# Altium PCB PCB1.PcbDoc (part 1 of 2)
Units mm, origin at the board's own origin, x right, y up, seen from the top; angles counter-clockwise.
Board outline 93.92 x 89.66 mm, 2 copper layers (Top Layer, Bottom Layer); 110 components, 45 nets, 506 pads, 98 vias.
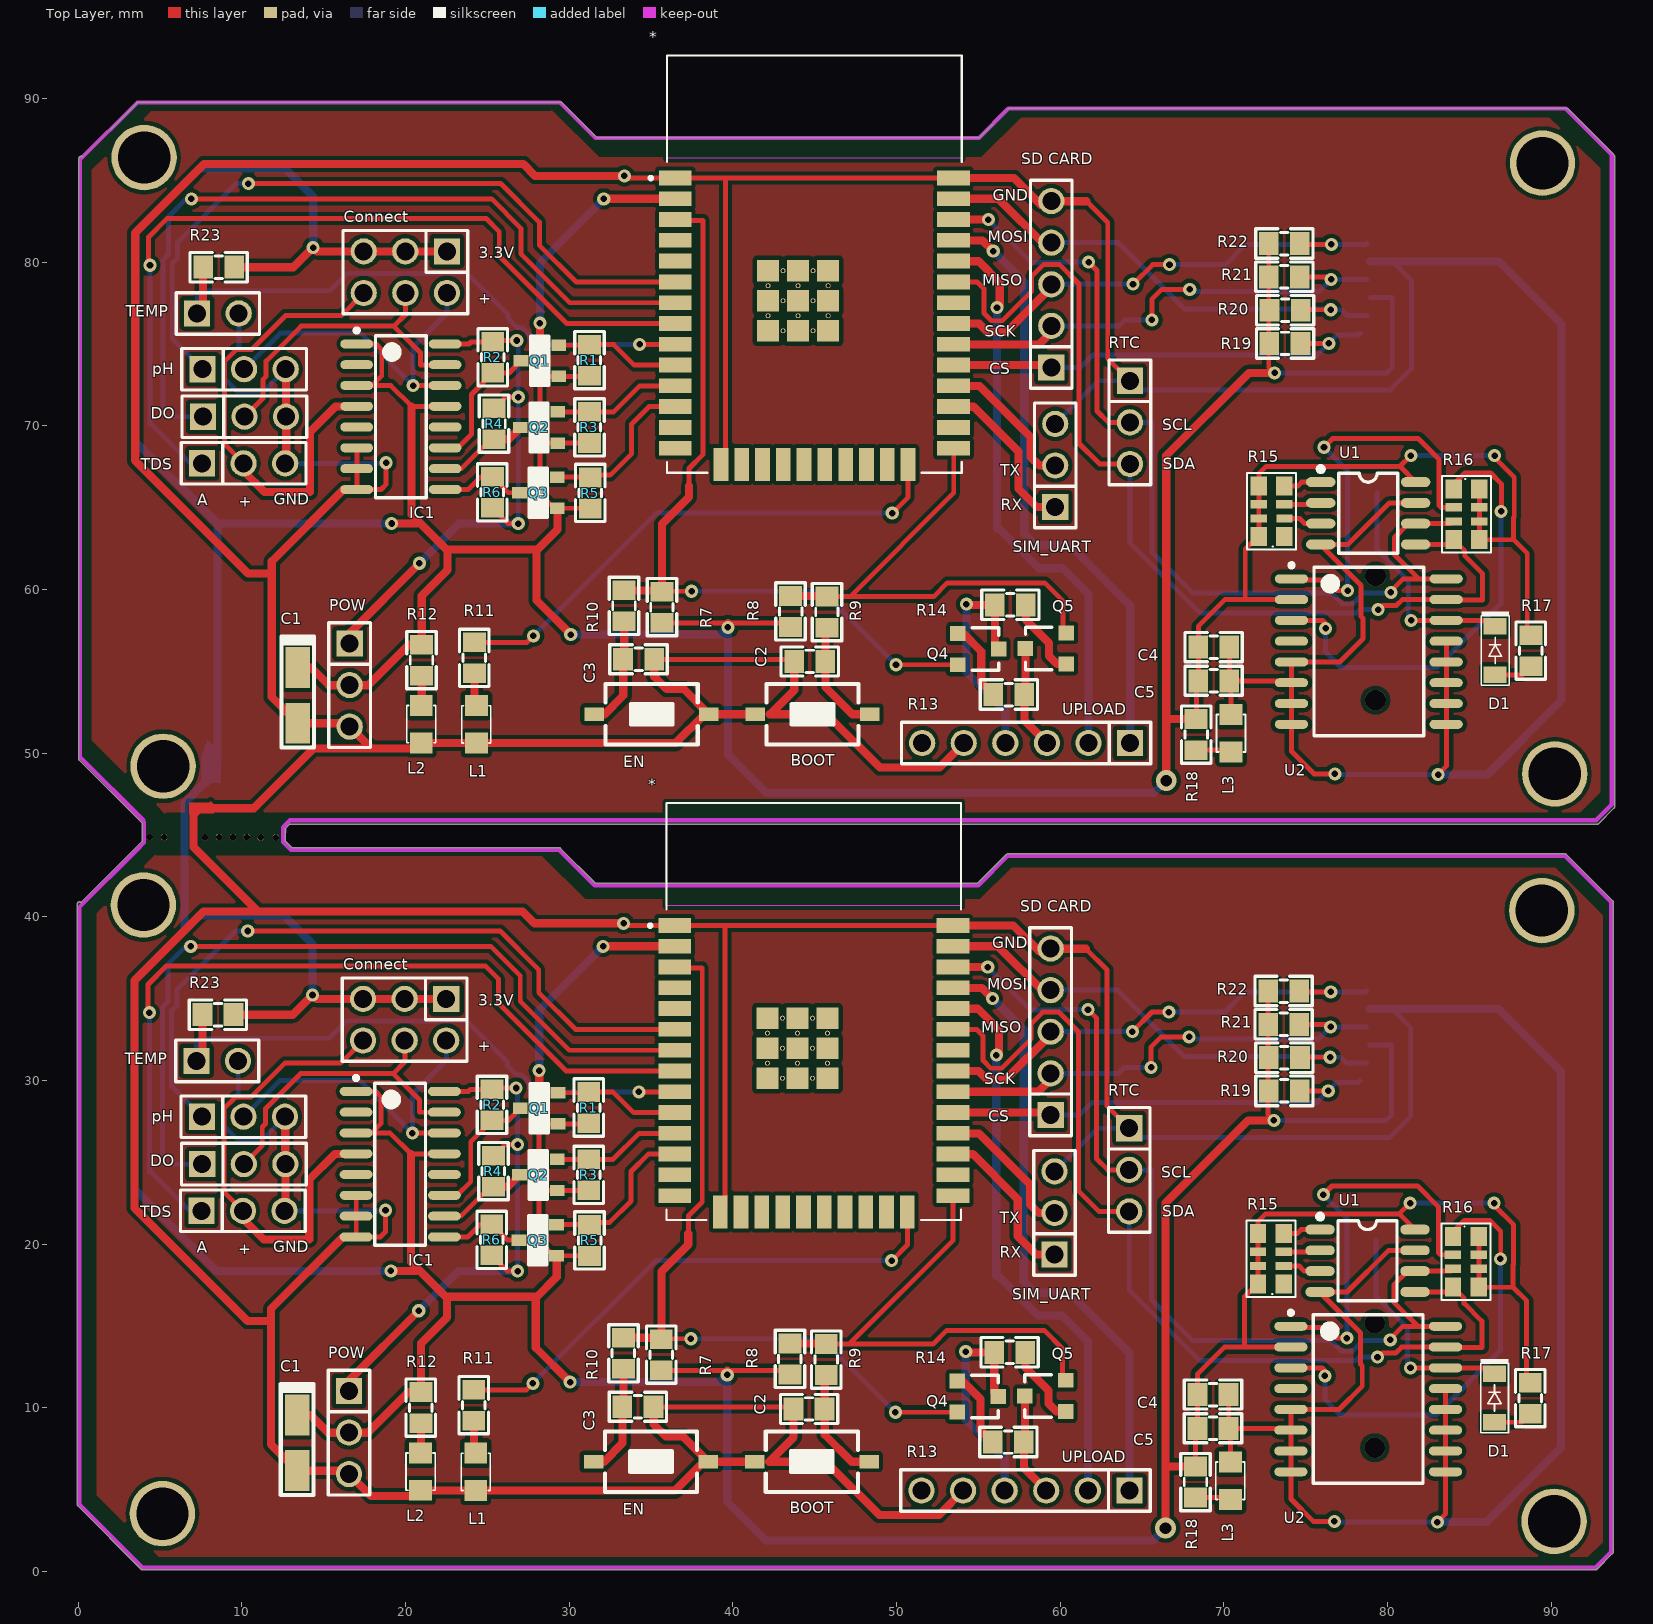
[diagram p0: Top Layer view]
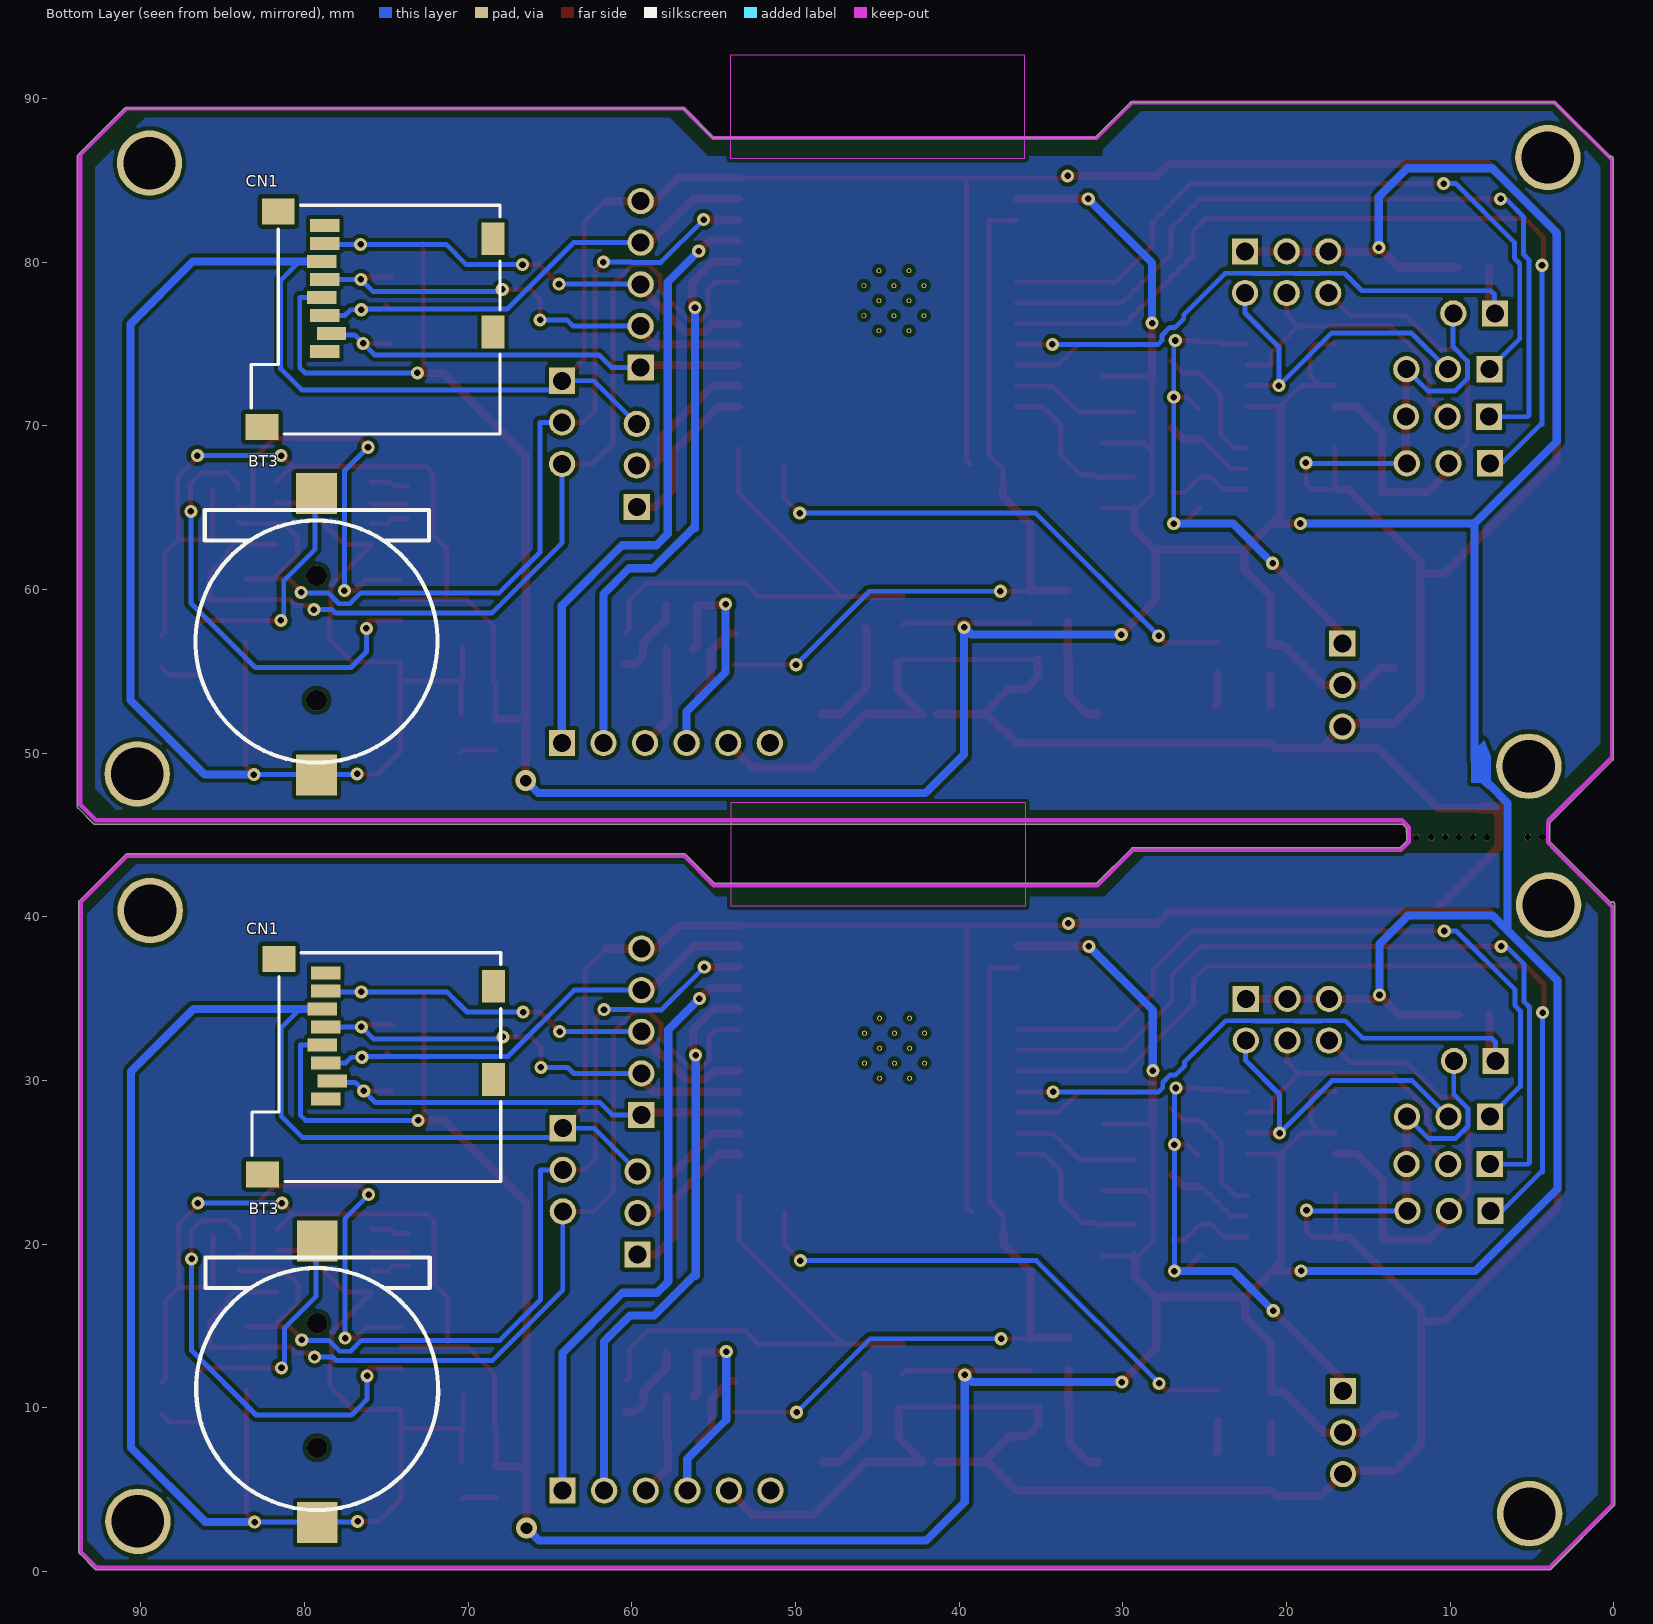
[diagram p1: Bottom Layer view, seen from below]
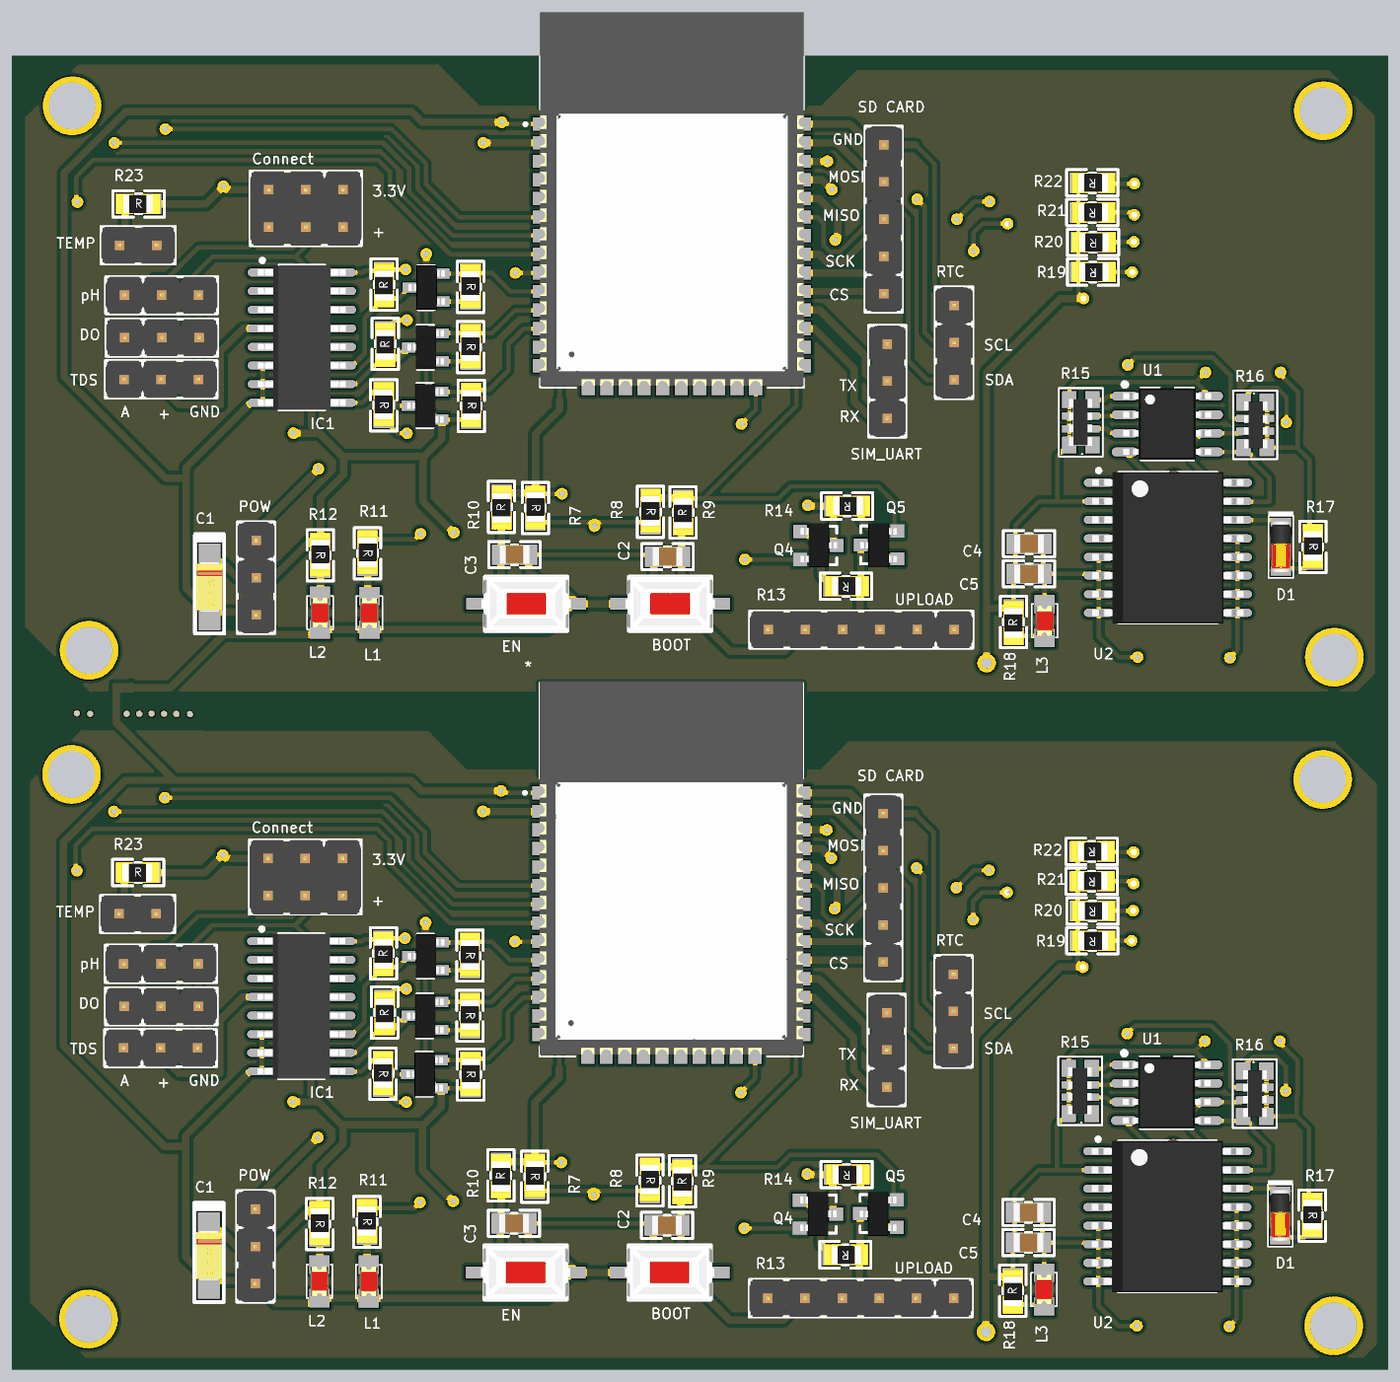
[diagram p3: 3D render of the assembled board from above, using the file's embedded part models]
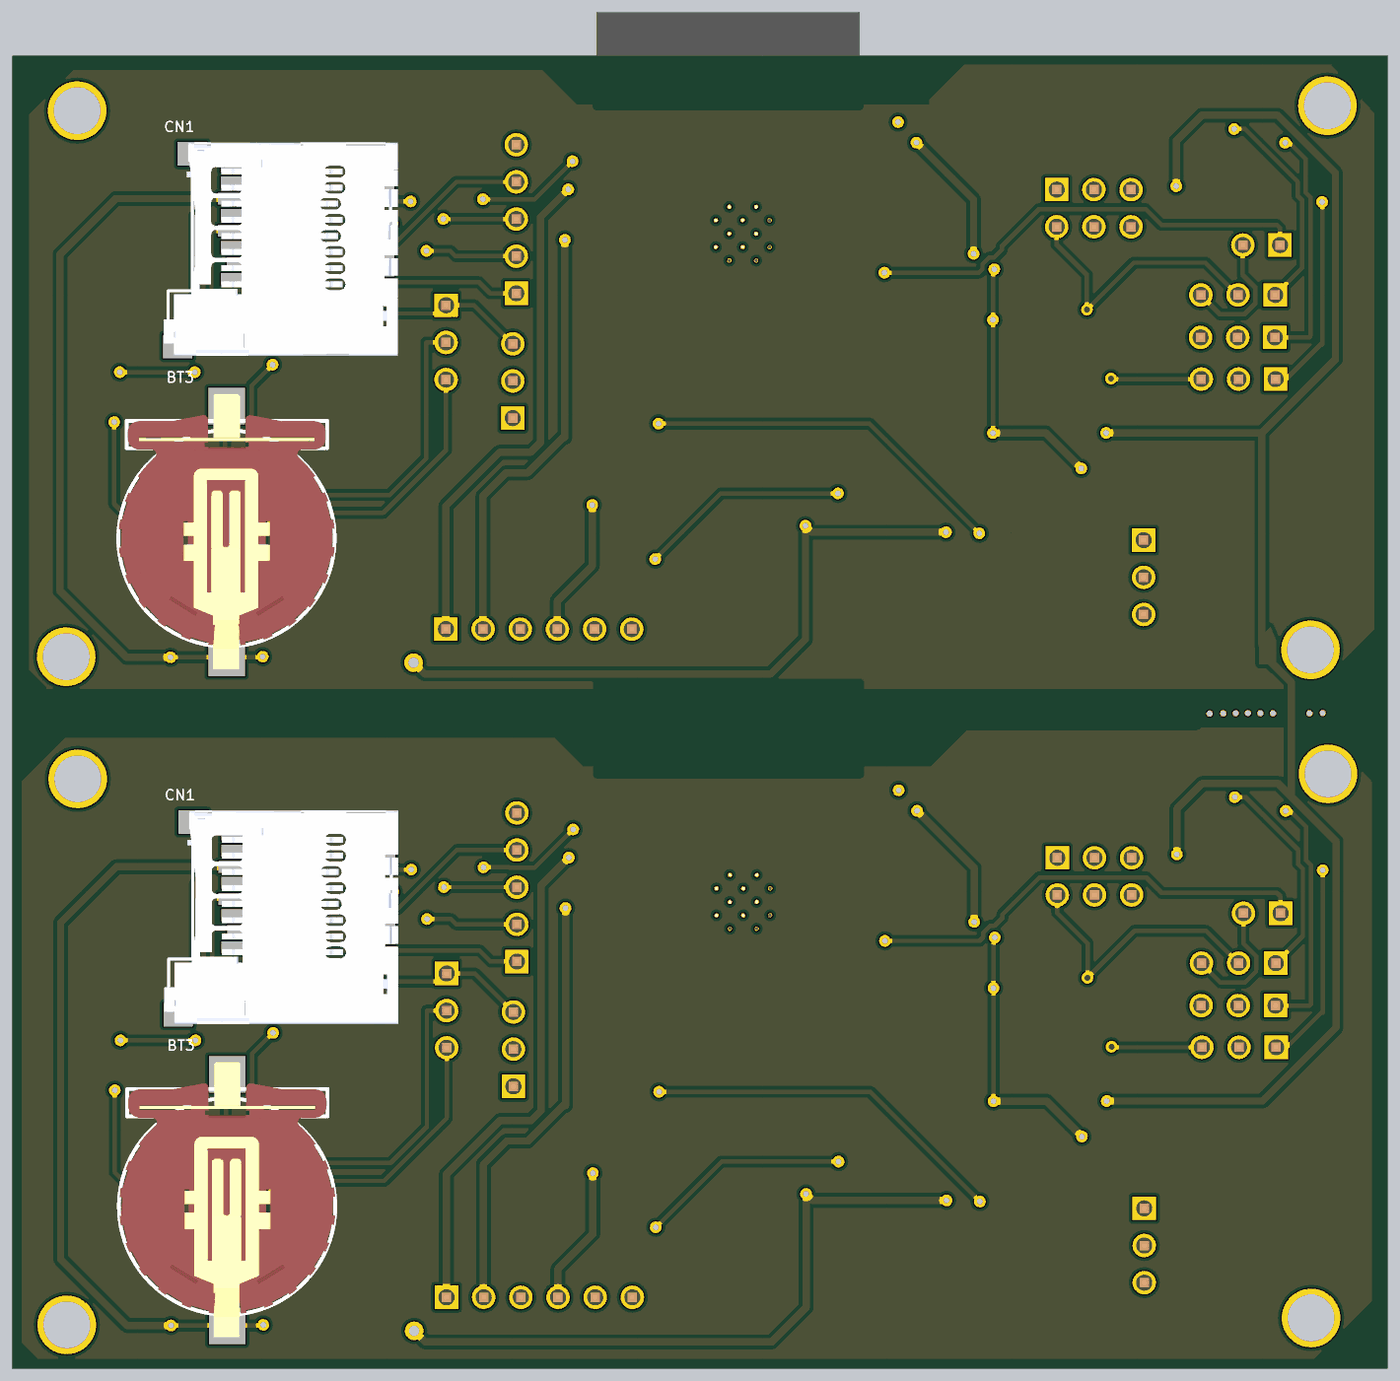
[diagram p4: 3D render of the assembled board from below, using the file's embedded part models]

## Layer stack, top to bottom
Top Solder: solder mask 0.0102, Solder Resist, Dk 3.5
Top Layer: signal copper 0.0356
Dielectric 1: dielectric 0.32, FR-4, Dk 4.8
Bottom Layer: signal copper 0.0356
Bottom Solder: solder mask 0.0102, Solder Resist, Dk 3.5

## Board outline
-0.047,4.09 -0.047,40.78 cw(c0.08,40.78) 0.175,40.865 3.903,44.593 3.903,45.727 0.08,49.55 0.08,49.549 cw(c0.17,49.64) 0.043,49.64 0.043,86.33 cw(c0.17,86.33) 0.265,86.415 3.58,89.73 cw(c3.67,89.64) 3.67,89.767 29.48,89.767 cw(c29.48,89.64) 29.571,89.73 29.57,89.73 31.703,87.597 55.037,87.597 56.79,89.35 cw(c56.88,89.26) 56.88,89.387 90.94,89.387 cw(c90.94,89.26) 91.031,89.35 91.03,89.35 93.84,86.54 cw(c93.75,86.45) 93.877,86.45 93.877,46.73 cw(c93.75,46.73) 93.84,46.64 92.89,45.69 92.891,45.69 cw(c92.8,45.78) 92.8,45.653 12.913,45.653 12.657,45.397 12.657,44.623 13.063,44.217 29.39,44.217 cw(c29.39,44.09) 29.48,44.18 31.613,42.047 54.947,42.047 56.7,43.8 56.699,43.8 cw(c56.79,43.71) 56.79,43.837 90.85,43.837 cw(c90.85,43.71) 90.94,43.8 93.75,40.99 cw(c93.66,40.9) 93.787,40.9 93.787,1.18 cw(c93.66,1.18) 93.75,1.09 92.8,0.14 cw(c92.71,0.23) 92.71,0.103 3.94,0.103 cw(c3.94,0.23) 3.849,0.14 3.85,0.14 -0.01,4 -0.01,3.999 cw(c0.08,4.09)

## Design rules (kind name [scope] priority, off if disabled: settings)
Clearance [All] p1: gap=0.254 ignorepadtopadclearanceinfootprint=FALSE except(0: Arc-Hole Track-Hole SMDPad-Hole THPad-Hole Via-Hole Fill-Hole Poly-Hole Region-Hole Text-Hole)
PolygonConnect [All] p1: connectstyle=Relief reliefconductorwidth=0.254 reliefentries=4 polygonreliefangle="90 Angle" airgapwidth=0.254
RoutingVias [All] p1: holewidth=0.711 width=1.27 viastyle="Through Hole" minholewidth=0.711 minwidth=1.27 maxholewidth=0.711 maxwidth=1.27
SolderMaskExpansion [All] p1: expansion=0.102 istentingtop=FALSE
Width [All] p1: maxlimit=1 minlimit=0.254 preferedwidth=0.5
30 further rules are at their usual default settings.

## Classes and differential pairs
component class Sheet1: BT1 BT2 R?

## Components (designator, comment, footprint, x,y, rotation, side; value= is the part's Value field where it differs from the comment)
* "ESP32 WROOM 32" ESP32-WROOM-32D 44.987,79.881 r0 top
* "ESP32 WROOM 32" ESP32-WROOM-32D 44.947,34.211 r0 top
BOOT "Nut Nhan 2 Chan SMD 3x6x2.5" "Nut Nhan 2 Chan SMD 3x6x2.5" 44.869,52.376 r0 top (schematic designator BT1)
BOOT "Nut Nhan 2 Chan SMD 3x6x2.5" "Nut Nhan 2 Chan SMD 3x6x2.5" 44.829,6.706 r0 top (schematic designator BT1)
BT3 "CR1220 SMD" "DE PIN CR1220" 79.259,57.256 r0 bottom
BT3 "CR1220 SMD" "DE PIN CR1220" 79.219,11.586 r0 bottom
C1 "1uF" "tu tantalum smd3216" 13.419,53.526 r270 top
C1 "1uF" "tu tantalum smd3216" 13.379,7.856 r270 top
C2 "33nF" "tu 0805" 44.699,55.596 r180 top
C2 "33nF" "tu 0805" 44.659,9.926 r180 top
C3 "33nF" "tu 0805" 34.239,55.736 r0 top
C3 "33nF" "tu 0805" 34.199,10.066 r0 top
C4 "104" "tu 0805" 69.375,56.479 r0 top
C4 "104" "tu 0805" 69.335,10.809 r0 top
C5 "104" "tu 0805" 69.375,54.419 r0 top
C5 "104" "tu 0805" 69.335,8.749 r0 top
CN1 "MicroSD Card" "MicroSD Card" 68.05,69.5 r90 bottom
CN1 "MicroSD Card" "MicroSD Card" 68.01,23.83 r90 bottom
Connect "JP 2x3 2.54" "JP 2x3 DT" 19.989,79.386 r180 top
Connect "JP 2x3 2.54" "JP 2x3 DT" 19.949,33.716 r180 top
D1 "Diode" SOD80 86.579,56.266 r90 top
D1 "Diode" SOD80 86.539,10.596 r90 top
DO "DO" "JP 1x3 DT" 7.619,70.556 r0 top
DO "DO" "JP 1x3 DT" 7.579,24.886 r0 top
EN "Nut Nhan 2 Chan SMD 3x6x2.5" "Nut Nhan 2 Chan SMD 3x6x2.5" 35.039,52.376 r180 top (schematic designator BT2)
EN "Nut Nhan 2 Chan SMD 3x6x2.5" "Nut Nhan 2 Chan SMD 3x6x2.5" 34.999,6.706 r180 top (schematic designator BT2)
IC1 "4053" SO16 19.719,70.556 r0 top value=CD4053
IC1 "4053" SO16 19.679,24.886 r0 top value=CD4053
L1 "LED 0805" LED-0805-Red 24.329,52.902 r270 top
L1 "LED 0805" LED-0805-Red 24.289,7.232 r270 top
L2 "LED 0805" LED-0805-Red 20.959,52.912 r270 top
L2 "LED 0805" LED-0805-Red 20.919,7.242 r270 top
L3 "LED 0805" LED-0805-Red 70.439,50.07 r90 top
L3 "LED 0805" LED-0805-Red 70.399,4.4 r90 top
pH "pH" "JP 1x3 DT" 7.599,73.456 r0 top
pH "pH" "JP 1x3 DT" 7.559,27.786 r0 top
POW "JP 1x3 2.54" "JP 1x3 DT" 16.589,56.696 r270 top
POW "JP 1x3 2.54" "JP 1x3 DT" 16.549,11.026 r270 top
Q1 "DMN2075U-7" SOT23#1 28.209,73.976 r90 top
Q1 "DMN2075U-7" SOT23#1 28.169,28.306 r90 top
Q2 "DMN2075U-7" SOT23#1 28.159,69.896 r90 top
Q2 "DMN2075U-7" SOT23#1 28.119,24.226 r90 top
Q3 "DMN2075U-7" SOT23#1 28.119,65.916 r90 top
Q3 "DMN2075U-7" SOT23#1 28.079,20.246 r90 top
Q4 "HF" SOT23#2 54.999,56.356 r270 top value=C9014
Q4 "HF" SOT23#2 54.959,10.686 r270 top value=C9014
Q5 "HF" SOT23#2 59.129,56.396 r90 top value=C9014
Q5 "HF" SOT23#2 59.089,10.726 r90 top value=C9014
R1 "10k" "tro smd 0805" 31.299,74.016 r270 top
R1 "10k" "tro smd 0805" 31.259,28.346 r270 top
R2 "10k" "tro smd 0805" 25.269,74.176 r90 top
R2 "10k" "tro smd 0805" 25.229,28.506 r90 top
R3 "10k" "tro smd 0805" 31.299,69.906 r270 top
R3 "10k" "tro smd 0805" 31.259,24.236 r270 top
R4 "10k" "tro smd 0805" 25.349,70.126 r90 top
R4 "10k" "tro smd 0805" 25.309,24.456 r90 top
R5 "10k" "tro smd 0805" 31.349,65.896 r270 top
R5 "10k" "tro smd 0805" 31.309,20.226 r270 top
R6 "10k" "tro smd 0805" 25.369,65.936 r270 top
R6 "10k" "tro smd 0805" 25.329,20.266 r270 top
R7 "10k" "tro smd 0805" 35.729,58.916 r270 top
R7 "10k" "tro smd 0805" 35.689,13.246 r270 top
R8 "10k" "tro smd 0805" 43.589,58.656 r270 top
R8 "10k" "tro smd 0805" 43.549,12.986 r270 top
R9 "470R" "Tro SMD 0805" 45.689,58.616 r90 top
R9 "470R" "Tro SMD 0805" 45.649,12.946 r90 top
R10 "470R" "Tro SMD 0805" 33.289,58.996 r90 top
R10 "470R" "Tro SMD 0805" 33.249,13.326 r90 top
R11 "1k" "tro smd 0805" 24.269,55.826 r270 top
R11 "1k" "tro smd 0805" 24.229,10.156 r270 top
R12 "1k" "tro smd 0805" 21.039,55.686 r270 top
R12 "1k" "tro smd 0805" 20.999,10.016 r270 top
R13 "10k" "tro smd 0805" 56.869,53.516 r180 top
R13 "10k" "tro smd 0805" 56.829,7.846 r180 top
R14 "10k" "tro smd 0805" 56.959,58.996 r180 top
R14 "10k" "tro smd 0805" 56.919,13.326 r180 top
R15 "4.7k" "tro bang 0603 4" 72.939,64.746 r180 top
R15 "4.7k" "tro bang 0603 4" 72.899,19.076 r180 top
R16 "4.7k" "tro bang 0603 4" 84.801,64.615 r0 top
R16 "4.7k" "tro bang 0603 4" 84.761,18.945 r0 top
R17 "200R" "tro smd 0805" 88.82,56.26 r270 top
R17 "200R" "tro smd 0805" 88.78,10.59 r270 top
R18 "1k" "tro smd 0805" 68.249,51.131 r90 top
R18 "1k" "tro smd 0805" 68.209,5.461 r90 top
R19 "1k" "tro smd 0805" 73.74,74.97 r180 top
R19 "1k" "tro smd 0805" 73.7,29.3 r180 top
R20 "1k" "tro smd 0805" 73.744,76.999 r180 top
R20 "1k" "tro smd 0805" 73.704,31.329 r180 top
R21 "1k" "tro smd 0805" 73.7,79.04 r180 top
R21 "1k" "tro smd 0805" 73.66,33.37 r180 top
R22 "1k" "tro smd 0805" 73.7,81.07 r180 top
R22 "1k" "tro smd 0805" 73.66,35.4 r180 top
R23 "10k" "tro smd 0805" 8.58,79.75 r0 top
R23 "10k" "tro smd 0805" 8.54,34.08 r0 top
RTC "JP 1x3 2.54" "JP 1x3 DT" 64.26,72.75 r270 top
RTC "JP 1x3 2.54" "JP 1x3 DT" 64.22,27.08 r270 top
"SD CARD" "JP 1x5 2.54" "JP 1x5 DT" 59.459,73.566 r90 top
"SD CARD" "JP 1x5 2.54" "JP 1x5 DT" 59.419,27.896 r90 top
SIM_UART "SIM_UART" "JP 1x3 DT" 59.699,65.036 r90 top
SIM_UART "SIM_UART" "JP 1x3 DT" 59.659,19.366 r90 top
TDS "TDS" "JP 1x3 DT" 7.569,67.706 r0 top
TDS "TDS" "JP 1x3 DT" 7.529,22.036 r0 top
TEMP "JP 1x2 2.54" "JP 1x2 DT" 7.269,76.866 r0 top
TEMP "JP 1x2 2.54" "JP 1x2 DT" 7.229,31.196 r0 top
U1 "M95080" SOP8_L 78.819,64.656 r0 top
U1 "M95080" SOP8_L 78.779,18.986 r0 top
U2 "DS3231 SMD" "SOIC 16" 78.859,56.206 r0 top
U2 "DS3231 SMD" "SOIC 16" 78.819,10.536 r0 top
UPLOAD "JP 1x6 2.54" "JP 1x6 DT" 64.269,50.616 r180 top
UPLOAD "JP 1x6 2.54" "JP 1x6 DT" 64.229,4.946 r180 top

## Footprints (in the part's own frame and the unit in brackets; to place one, negate y for a bottom-side part, rotate by r counter-clockwise, add the part's x,y. Pads: shape width x height; smd on the part's side, far side on the other; paste and mask are expansions set on the pad)
"DE PIN CR1220" [mm]
  rect 2.5x2.5 smd: 1(0,-8.6) 2(0,8.6)
  silkscreen extent -7.39,-7.6 7.4,7.84, body extent -7.39,-9.42 7.36,9.38, height 4.27
ESP32-WROOM-32D [mm]
  rect 2x0.9 smd: 1(-8.5,5.26) 2(-8.5,3.99) 3(-8.5,2.72) 4(-8.5,1.45) 5(-8.5,0.18) 6(-8.5,-1.09) 7(-8.5,-2.36) 8(-8.5,-3.63) 9(-8.5,-4.9) 10(-8.5,-6.17) 11(-8.5,-7.44) 12(-8.5,-8.71) 13(-8.5,-9.98) 14(-8.5,-11.25) 25(8.5,-11.25) 26(8.5,-9.98) 27(8.5,-8.71) 28(8.5,-7.44) 29(8.5,-6.17) 30(8.5,-4.9) 31(8.5,-3.63) 32(8.5,-2.36) 33(8.5,-1.09) 34(8.5,0.18) 35(8.5,1.45) 36(8.5,2.72) 37(8.5,3.99) 38(8.5,5.26)
  rect 0.9x2 smd: 15(-5.715,-12.25) 16(-4.445,-12.25) 17(-3.175,-12.25) 18(-1.905,-12.25) 19(-0.635,-12.25) 20(0.635,-12.25) 21(1.905,-12.25) 22(3.175,-12.25) 23(4.445,-12.25) 24(5.715,-12.25)
  rect 1.33x1.33 smd: 39(-2.835,-4.075) 39(-2.835,-2.24) 39(-2.835,-0.405) 39(-1,-4.075) 39(-1,-2.24) 39(-1,-0.405) 39(0.835,-4.075) 39(0.835,-2.24) 39(0.835,-0.405)
  round 0.3 hole 0.2: 39(-2.835,-3.157) 39(-2.835,-1.322) 39(-1.917,-4.075) 39(-1.917,-2.24) 39(-1.917,-0.405) 39(-1,-3.157) 39(-1,-1.322) 39(-0.082,-4.075) 39(-0.082,-2.24) 39(-0.082,-0.405) 39(0.835,-3.157) 39(0.835,-1.322)
  Keep-Out Layer region: 9,6.45 -9,6.45 -9,12.75 9,12.75
  Keep-Out Layer region: 9,6.45 -9,6.45 -9,12.75 9,12.75
  silkscreen extent -10.1,-12.75 9,12.75, body extent -9,-12.62 9,12.88, height 3.2
"JP 1x2 DT" [mm] "2 pins, 1 row, straight, gold plating"
  rect 1.6x1.6 hole 1.1: 1(0,0)
  round 1.6 hole 1.1: 2(2.54,0)
  silkscreen extent -1.27,-1.27 3.81,1.27, body extent -1.27,-1.27 3.81,1.27, height 8.54
"JP 1x3 DT" [mm]
  rect 1.6x1.6 hole 1.1: 1(0,0)
  round 1.6 hole 1.1: 2(2.54,0) 3(5.08,0)
  silkscreen extent -1.27,-1.27 6.35,1.27, body extent -1.27,-1.27 6.35,1.27, height 8.54
"JP 1x5 DT" [mm] "5 pins, 1 row, straight, gold plating"
  rect 1.6x1.6 hole 1.1: 1(0,0)
  round 1.6 hole 1.1: 2(2.54,0) 3(5.08,0) 4(7.62,0) 5(10.16,0)
  silkscreen extent -1.27,-1.27 11.43,1.27, body extent -1.27,-1.27 11.43,1.27, height 8.54
"JP 1x6 DT" [mm] "6 pins, 1 row, straight, gold plating"
  rect 1.6x1.6 hole 1.1: 1(0,0)
  round 1.6 hole 1.1: 2(2.54,0) 3(5.08,0) 4(7.62,0) 5(10.16,0) 6(12.7,0)
  silkscreen extent -1.27,-1.27 13.97,1.27, body extent -1.27,-1.27 13.97,1.27, height 8.54
"JP 2x3 DT" [mm]
  rect 1.6x1.6 hole 1.1: 1(-2.54,-1.27)
  round 1.6 hole 1.1: 2(0,-1.27) 3(2.54,-1.27) 4(2.54,1.27) 5(0,1.27) 6(-2.54,1.27)
  silkscreen extent -3.81,-2.54 3.81,2.54, body extent -3.81,-2.54 3.81,2.54, height 8.55
LED-0805-Red [mil]
  rect 50x55 smd: 1(0,0) 2(90,0)
  silkscreen extent 0,-35 90,35, body extent 5,-25 85,25, height 43
"MicroSD Card" [mm] "Connector; SD Card Type A, SM, 9 Position, Right Angle, Pitch 2.5 mm, Body 23.3 x 27.4 x 3.4 mm (LxWxH)"
  rect 0.8x1.8 smd: 1(5.04,10.7) 2(6.14,10.3) 3(7.24,10.7) 4(8.34,10.9) 5(9.44,10.7) 6(10.54,10.9) 7(11.64,10.7) 8(12.74,10.7)
  rect 1.6x2 smd: MH1(0.43,14.55) MH2(13.6,13.55)
  rect 2x1.4 smd: MH3(11.93,0.43) MH4(6.23,0.43)
  silkscreen extent 0,0 13.98,15.2, body extent -0.21,-0.49 14.39,15.51, height 1.72
"Nut Nhan 2 Chan SMD 3x6x2.5" [mm] "Switch SMD type"
  rect 1.2x0.8 smd: 1(-3.5,0) 2(3.5,0)
  silkscreen extent -2.82,-1.85 2.82,1.85, body extent -3.05,-1.85 3.05,1.85, height 2.5
SO16 [mm] "SOIC, 16-Leads, Body 9.90x3.91mm, Pitch 1.27mm, IPC Medium Density"
  oval 2x0.55 smd: 1(-2.7,4.445) 2(-2.7,3.175) 3(-2.7,1.905) 4(-2.7,0.635) 5(-2.7,-0.635) 6(-2.7,-1.905) 7(-2.7,-3.175) 8(-2.7,-4.445) 9(2.7,-4.445) 10(2.7,-3.175) 11(2.7,-1.905) 12(2.7,-0.635) 13(2.7,0.635) 14(2.7,1.905) 15(2.7,3.175) 16(2.7,4.445)
  silkscreen extent -2.82,-4.95 1.55,5.39, body extent -3,-4.95 3,4.95, height 1.4
SOD80 [mm] "Diodes - General Purpose"
  rect 1x1.4 smd: 1(-1.475,0) 2(1.475,0)
  silkscreen extent -2.12,-0.85 2.4,0.85, body extent -1.74,-0.72 1.76,0.73, height 1.43
"SOIC 16" [mm] "SOIC, 16-Leads, Body 10.30x7.50mm, Pitch 1.27mm, IPC Medium Density"
  oval 2.032x0.55 smd: 1(-4.725,4.445) 2(-4.725,3.175) 3(-4.725,1.905) 4(-4.725,0.635) 5(-4.725,-0.635) 6(-4.725,-1.905) 7(-4.725,-3.175) 8(-4.725,-4.445) 9(4.725,-4.445) 10(4.725,-3.175) 11(4.725,-1.905) 12(4.725,-0.635) 13(4.725,0.635) 14(4.725,1.905) 15(4.725,3.175) 16(4.725,4.445)
  silkscreen extent -4.85,-5.15 3.35,5.39, body extent -5.15,-5.17 5.16,5.16, height 2.48
SOP8_L [mm] "SOIC, 8-Leads, Body 4.9x3.9mm, Pitch 1.27mm, IPC High Density"
  oval 1.8x0.6 smd: 1(-2.9,1.905) 2(-2.9,0.635) 3(-2.9,-0.635) 4(-2.9,-1.905) 5(2.9,-1.905) 6(2.9,-0.635) 7(2.9,0.635) 8(2.9,1.905)
  silkscreen extent -3.2,-2.44 1.8,3, body extent -3.01,-2.45 2.99,2.45, height 1.75
SOT23#1 [mm] "SOT 23 _ 1-3-2"
  rect 0.7x0.9 smd: 1(-0.95,-1.15) 2(0.95,-1.15) 3(0,1.15)
  silkscreen extent -1.5,-0.55 1.5,0.55, body extent -1.5,-1.28 1.5,1.22, height 1.06
SOT23#2 [mm] "SOT23"
  rect 0.9x0.95 smd: 1(-0.95,-1.25) 2(0,1.25)
  rect 0.9x0.95 smd mask+0: 3(0.95,-1.25)
  silkscreen extent -1.3,-0.38 1.3,1.25, body extent -1.52,-1.23 1.48,1.27, height 1.06
"tro bang 0603 4" [mil]
  rect 39.37x45.67 smd: 1(-30,60) 4(-30,-62) 5(32,-62) 8(32,60)
  rect 39.37x20 smd: 2(-30.06,16.08) 3(-30,-18.08) 6(32.06,-18.08) 7(32.06,16.08)
  silkscreen extent -58,-93 60,91, body extent -29,-64 33,62, height 22
"tro smd 0805" [mm]
  rect 1.2x1.4 smd: 1(-0.946,-0.061) 2(0.954,-0.061)
  silkscreen extent -1.75,-0.97 1.75,0.84, body extent -1.56,-0.76 1.44,0.64, height 0.53
"Tro SMD 0805" [mm]
  rect 1.2x1.4 smd: 1(-0.946,-0.061) 2(0.954,-0.061)
  silkscreen extent -1.75,-0.97 1.75,0.84, body extent -1.56,-0.76 1.44,0.64, height 0.53
"tu 0805" [mm] "Compoment SMD 80x50mil"
  rect 1.2x1.4 smd: 1(-0.946,-0.003) 2(0.954,-0.003)
  silkscreen extent -1.75,-0.89 1.75,0.89, body extent -1.01,-0.64 1.01,0.63, height 0.61
"tu tantalum smd3216" [mm]
  rect 2.5x1.5 smd: 1(-1.7,0) 2(1.7,0)
  silkscreen extent -3.61,-1 3.18,1, body extent -1.7,-0.9 1.7,0.9, height 1.69

## Part data
BT3 BT3: library part "De pin CR1220 SMD", Ma_Hang=MH000833
  BT3: Ten="Ð? PIN CR1220 SMD"
  BT3: Ten="Đế PIN CR1220 SMD"
C1 C1: library part "Tu tantalum 1uF 25V SMD3216", "Dán", Chung_Loai=Dán, Don_Vi=Con, Ma_Hang=MH007472, So_Chan=2
  C1: Ten_Linh_Kien="T? tantalum 105E-1uF 25V SMD3216"
  C1: Ten_Linh_Kien="Tụ tantalum 105E-1uF 25V SMD3216"
C2 C2 C3 C3: library part "Tu 0805 33nF 50V 20%", "Dán", Chung_Loai=Dán, Don_Vi=Con, Ma_Hang=MH007854, So_Chan=2
  C2 C3: Ten_Linh_Kien="T? 0805 33nF 50V 20%"
  C2 C3: Ten_Linh_Kien="Tụ 0805 33nF 50V 20%"
C4 C4 C5 C5: library part "Tu 0805 104 50V 10%", "Dán", Chung_Loai=Dán, Don_Vi=Con, Ma_Hang=MH004551, So_Chan=2
  C4 C5: Ten_Linh_Kien="T? 0805 104-100nF 10% 50V"
  C4 C5: Ten_Linh_Kien="Tụ 0805 104-100nF 10% 50V"
Connect Connect: library part "JP 2x3 2.54 Duc Thang", "C?m", Don_Vi=Con, Ma_Hang=MH002686
  Connect: Chung_Loai=C?m, Ten_Linh_Kien="Jump Ðôi Ð?c 2.54MM 2x40P Th?ng 11MM"
  Connect: Chung_Loai=Cắm, Ten_Linh_Kien="Jump Đôi Đực 2.54MM 2x40P Thẳng 11MM"
D1 D1: "Default Diode", Code_JEDEC=DO-214-AB, LatestRevisionDate=17-Jul-2002, LatestRevisionNote="Re-released for DXP Platform.", PackageReference=SMC, PackageVersion=Sep-1996, Published=8-Jun-2000, Publisher="Altium Limited"
DO DO pH pH POW POW RTC RTC SIM_UART SIM_UART TDS TDS: library part "JP 1x3 2.54 Duc Thang", "C?m", Don_Vi=Con, Ma_Hang=MH000903
  DO pH POW RTC SIM_UART TDS: Chung_Loai=C?m, Ten_Linh_Kien="Jump Ðon Ð?c 2.54MM 1x40P Th?ng 11MM"
  DO pH POW RTC SIM_UART TDS: Chung_Loai=Cắm, Ten_Linh_Kien="Jump Đơn Đực 2.54MM 1x40P Thẳng 11MM"
IC1 IC1: "Dual 4-channel analogue  multiplexer/demultiplexer"
L1 L1 L2 L2 L3 L3: library part "LED 0805 Do", "Dán", Chung_Loai=Dán, Don_Vi=Con, Ma_Hang=MH000897
  L1 L2 L3: Ten_Linh_Kien="LED 0805 Màu Ð? (Red)"
  L1 L2 L3: Ten_Linh_Kien="LED 0805 Màu Đỏ (Red)"
Q1 Q1 Q2 Q2 Q3 Q3: "MOSFET N-CH 20V 4.2A SOT23", LatestRevisionDate=17-Jul-2002, LatestRevisionNote="Re-released for DXP Platform.", PackageReference=E3, PackageVersion=1995/1996, Published=8-Jun-2000, Publisher="Altium Limited"
Q4 Q4 Q5 Q5: library part "C1815 HF SMD", "NPN transistor"
  Q4 Q5: =C9012
R1 R1 R2 R2 R3 R3 R4 R4 R5 R5 R6 R6 R7 R7 R8 R8 R11 R11 R12 R12 R13 R13 R14 R14 R18 R18 R19 R19 R20 R20 R21 R21 R22 R22: library part "Tro 0805 1% 1k", "Dán", Chung_Loai=Dán, Don_Vi=Con, Ma_Hang=MH005468, So_Chan=2
  R1 R2 R3 R4 R5 R6 R7 R8 R11 R12 R13 R14 R18 R19 R20 R21 R22: Ten_Linh_Kien="Tr? 0805 1% 1k"
  R1 R2 R3 R4 R5 R6 R7 R8 R11 R12 R13 R14 R18 R19 R20 R21 R22: Ten_Linh_Kien="Trở 0805 1% 1k"
R9 R9 R10 R10: library part "Tro 0805 5% 470R", "Dán", Chung_Loai=Dán, Don_Vi=Con, Ma_Hang=MH005341, So_Chan=2
  R9 R10: Ten_Linh_Kien="Tr? 0805 5% 470R"
  R9 R10: Ten_Linh_Kien="Trở 0805 5% 470R"
R15 R15 R16 R16: library part "Tro bang 0603 4.7k", "Dán", Chung_Loai=Dán, Don_Vi=Con, Ma_Hang=MH001448, So_Chan=8
  R15 R16: Ten_Linh_Kien="Tr? bang 0603x4 4.7k"
  R15 R16: Ten_Linh_Kien="Trở băng 0603x4 4.7k"
R17 R17: library part "Tro 0805 5% 220R", "Dán", Chung_Loai=Dán, Don_Vi=Con, Ma_Hang=MH005259, So_Chan=2
  R17: Ten_Linh_Kien="Tr? 0805 5% 220R"
  R17: Ten_Linh_Kien="Trở 0805 5% 220R"
R23 R23: library part "Tro 0805 1% 10k", "Dán", Chung_Loai=Dán, Don_Vi=Con, Ma_Hang=MH005473, So_Chan=2
  R23: Ten_Linh_Kien="Tr? 0805 1% 10k"
  R23: Ten_Linh_Kien="Trở 0805 1% 10k"
"SD CARD" "SD CARD": library part "JP 1x5 2.54 Duc Thang", "C?m", Don_Vi=Con, Ma_Hang=MH000903
  "SD CARD": Chung_Loai=C?m, Ten_Linh_Kien="Jump Ðon Ð?c 2.54MM 1x40P Th?ng 11MM"
  "SD CARD": Chung_Loai=Cắm, Ten_Linh_Kien="Jump Đơn Đực 2.54MM 1x40P Thẳng 11MM"
TEMP TEMP: library part "JP 1x2 2.54 Duc Thang", "C?m", Don_Vi=Con, Ma_Hang=MH000903
  TEMP: Chung_Loai=C?m, Ten_Linh_Kien="Jump Ðon Ð?c 2.54MM 1x40P Th?ng 11MM"
  TEMP: Chung_Loai=Cắm, Ten_Linh_Kien="Jump Đơn Đực 2.54MM 1x40P Thẳng 11MM"
U1 U1: library part EEPROM_M95080, "EEPROM_M95080"
U2 U2: "SOIC"
UPLOAD UPLOAD: library part "JP 1x6 2.54 Duc Thang", "C?m", Don_Vi=Con, Ma_Hang=MH000903
  UPLOAD: Chung_Loai=C?m, Ten_Linh_Kien="Jump Ðon Ð?c 2.54MM 1x40P Th?ng 11MM"
  UPLOAD: Chung_Loai=Cắm, Ten_Linh_Kien="Jump Đơn Đực 2.54MM 1x40P Thẳng 11MM"
BOOT EN: Ma_Hang=MH001036, Ten="Nút Nh?n 2 Chân 3x6x2.5MM SMD"
BOOT EN: Ma_Hang=MH001036, Ten="Nút Nhấn 2 Chân 3x6x2.5MM SMD"

## Free pads (board coordinates)
  round 4 hole 3.2: 2(3.99,40.72) 2(4.03,86.39) 2(5.15,3.53) 2(5.19,49.2) 2(89.43,40.38) 2(89.47,86.05) 2(90.18,3.06) 2(90.22,48.73)
  round 0.4 hole 0.4: 2(4.36,44.89) 2(5.26,44.86) 2(7.75,44.86) 2(8.61,44.87) 2(9.46,44.87) 2(10.3,44.87) 2(11.15,44.85) 2(12.08,44.84)

## Via types
v1: diameter 0.8, hole 0.4, Top Layer to Bottom Layer, 92 vias
v2: diameter 1.27, hole 1.27, Top Layer to Bottom Layer, 4 vias
v3: diameter 1.27, hole 0.711, Top Layer to Bottom Layer, 2 vias

## Nets (pads, with @x,y where several pads share a name; then routed paths per layer and width w, separated by ;. In a path a pad name is that pad's centre, name@x,y a point inside that pad or via, vN(x,y) a via of type N, cw(c..) or ccw(c..) an arc to the next point about the centre after c; other vN are vias at no path point)
3.3V: *.2@36.447,38.201 C1.1@13.379,9.556 C4.1@68.389,10.806 C5.1@68.389,8.746 CN1.4@78.91,32.17 Connect.1@22.489,34.986 Connect.2@19.949,34.986 Connect.3@17.409,34.986 IC1.1@16.979,29.331 IC1.3@16.979,26.791 IC1.13@22.379,25.521 POW.2@16.549,8.486 Q1.1@29.319,27.356 Q2.1@29.269,23.276 Q3.1@29.229,19.296 R1.2@31.199,27.391 R3.2@31.199,23.281 R5.2@31.249,19.271 R7.2@35.629,12.291 R8.2@43.489,12.031 R12.1@20.939,10.961 R15.5@72.087,20.651 R15.6@72.085,19.535 R15.7@72.085,18.667 R15.8@72.087,17.552 R16.5@85.574,17.37 R16.6@85.576,18.486 R16.7@85.576,19.354 R16.8@85.574,20.469 R17.1@88.719,11.536 R18.2@68.269,6.416 R19.2@72.746,29.361 R20.2@72.75,31.39 R21.2@72.706,33.431 R22.2@72.706,35.461 R23.2@9.494,34.019 U1.8@81.679,20.891 U2.2@74.094,13.711 | length 314.2
  Top Layer w0.3: IC1.3@16.99,26.785 IC1.3@17.915,26.785 ; IC1.1@16.99,29.325 18.165,29.325 18.51,28.98 18.51,27.38 IC1.3@17.915,26.785 ; IC1.13@22.39,25.515 20.335,25.515 19.065,26.785 IC1.3@17.915,26.785 ; R3.2@31.209,23.276 31.204,23.27 28.67,23.27 28.17,22.77 ; R1.2@31.209,27.386 31.174,27.35 28.33,27.35 28.17,27.19 28.17,22.77 ; R5.2@31.259,19.266 31.235,19.29 29.24,19.29 29.05,19.29 28.17,20.17 28.17,22.77 ; R7.2@35.639,12.286 43.239,12.286 R8.2@43.499,12.026 ; R18.2@68.28,6.41 68.28,8.62 68.4,8.74 68.4,12.08 70.025,13.705 71.27,13.705 ; R22.2@72.706,35.461 R21.2@72.706,33.431 72.706,27.914 v1(73.06,27.56) ; U2.2@74.105,13.705 71.27,13.705 ; v1(81.385,22.51) 80.725,21.85 ; U1.8@81.69,20.885 80.725,21.85 ; R16.8@85.585,20.463 85.585,19.349 85.586,19.348 85.586,18.48 85.585,18.478 85.585,17.365 87.665,17.365 ; v1(86.51,22.51) 86.51,22.37 87.704,21.176 87.704,18.767 87.665,18.728 87.665,17.365 ; R17.1@88.73,11.53 88.5,11.76 88.5,16.53 87.665,17.365 ; 71.27,13.705 71.27,16.8 72.016,17.546 72.097,17.546 72.097,18.66 72.096,18.661 72.096,19.529 72.097,19.531 72.097,21.397 72.55,21.85 80.725,21.85
  Top Layer w0.5: R23.2@9.494,34.019 13.119,34.019 v1(14.32,35.22) 14.56,34.98 Connect.1@22.5,34.98 ; C1.1@13.39,9.55 14.2,9.55 15.27,8.48 17.7,8.48 20.176,10.956 20.949,10.956 20.949,13.939 22.53,15.52 22.53,16.71 ; v1(19.11,18.36) 20.64,18.36 20.76,18.48 ; 20.335,25.515 20.335,18.905 20.76,18.48 ; 28.17,27.19 v1(28.17,30.6) ; Q3.1@29.24,19.29 29.24,17.99 27.96,16.71 ; v1(30.06,11.57) 27.96,13.67 27.96,16.71 ; v1(32.075,38.195) *.2@36.458,38.195 ; v1(39.66,12.01) v1@39.66,12.28 ; v3(66.44,2.65) 66.44,6.26 ; R18.2@68.28,6.41 66.59,6.41 66.44,6.26 ; v1(73.06,27.56) 71.49,27.56 66.44,22.51 66.44,6.26 ; 20.76,18.48 22.53,16.71 ; 22.53,16.71 22.53,16.78 27.96,16.78 27.96,16.71
  Bottom Layer w0.3: v1(73.06,27.56) 79.93,27.56 80.25,27.88 80.25,32.17 CN1.4@78.91,32.17 ; v1(81.385,22.51) v1(86.51,22.51)
  Bottom Layer w0.5: 7.694,48.163 6.494,46.963 6.494,39.164 ; v1(14.32,35.22) 14.32,38.33 12.58,40.07 7.4,40.07 6.494,39.164 ; v1(19.11,18.36) 8.47,18.36 3.446,23.384 3.446,36.116 6.494,39.164 ; v1(28.17,30.6) 28.17,34.29 v1(32.075,38.195) ; v1(30.06,11.57) 39.22,11.57 v1(39.66,12.01) 39.66,4.24 42.01,1.89 65.68,1.89 v3(66.44,2.65)
5V: IC1.16@22.379,29.331 POW.1@16.549,11.026 R2.2@25.29,29.46 R4.2@25.37,25.41 R6.2@25.269,19.311 | length 33.2
  Top Layer w0.3: IC1.16@22.39,29.325 22.395,29.33 23.84,29.33 23.964,29.454 25.301,29.454 25.386,29.54 v1(26.76,29.54) ; R6.2@25.279,19.306 26.235,18.35 v1(26.85,18.35) ; R4.2@25.381,25.404 26.056,26.08 v1(26.85,26.08)
  Top Layer w0.5: POW.1@16.56,11.02 16.56,11.68 v1(20.81,15.93)
  Bottom Layer w0.3: v1(26.76,29.54) 26.85,29.54 v1(26.85,26.08) v1(26.85,18.35)
  Bottom Layer w0.5: v1(20.81,15.93) 23.23,18.35 v1(26.85,18.35)
CS: "SD CARD.1"@59.419,27.896 *.29@53.447,28.041 CN1.2@78.31,29.97 R19.1@74.646,29.361 | length 27.7
  Top Layer w0.3: R19.1@74.646,29.361 v1(76.381,29.361)
  Top Layer w0.5: *.29@53.458,28.035 59.215,28.035 59.57,27.68
  Bottom Layer w0.3: 59.419,27.896 61.206,27.896 61.97,28.66 67.569,28.66 67.573,28.656 75.676,28.656 v1(76.381,29.361) 76.9,29.88 78.22,29.88 CN1.2@78.31,29.97
DO_ADC: *.7@36.447,31.851 DO.1@7.579,24.886 | length 49.7
  Top Layer w0.3: v1(6.88,38.19) 25.22,38.19 27.01,36.4 27.01,34.84 30.004,31.845 *.7@36.458,31.845
  Bottom Layer w0.3: v1(6.88,38.19) 6.57,38.19 5.482,37.102 5.482,34.801 5.154,34.473 5.154,24.966 5.24,24.88 DO.1@7.59,24.88
DO_ON: *.11@36.447,26.771 Q2.2@29.269,25.176 R3.1@31.199,25.181 | length 7.8
  Top Layer w0.3: Q2.2@29.28,25.17 29.286,25.176 31.209,25.176 32.676,25.176 34.25,26.75 36.443,26.75 *.11@36.458,26.765
DO_ON_5V: IC1.10@22.379,21.711 Q2.3@26.969,24.226 R4.1@25.37,23.51 | length 5.6
  Top Layer w0.3: IC1.10@22.39,21.705 23.375,21.705 25.174,23.504 R4.1@25.381,23.504
  Top Layer w0.5: R4.1@25.381,23.504 26.264,23.504 Q2.3@26.98,24.22
DO_POW: Connect.5@19.949,32.446 DO.2@10.119,24.886 IC1.15@22.379,28.061 | length 19.5
  Top Layer w0.3: DO.2@10.13,24.88 11.25,26 11.25,27.153 11.446,27.349 11.446,28.279 13.587,30.42 19.25,30.42 ; Connect.5@19.96,32.44 19.96,31.13 19.25,30.42 ; IC1.15@22.39,28.055 20.865,28.055 20.865,28.805 19.25,30.42
DTR: Q5.2@57.839,10.726 R13.1@57.775,7.907 UPLOAD.3@59.149,4.946 | length 6.4
  Top Layer w0.5: Q5.2@57.85,10.72 57.85,7.965 57.786,7.901 57.786,6.314 UPLOAD.3@59.16,4.94
EN: *.3@36.447,36.931 Q4.3@53.709,9.736 R7.1@35.629,14.191 R10.2@33.31,14.28 | length 47.7
  Top Layer w0.3: R7.1@35.55,14.274 35.605,14.22 35.639,14.22 v1(37.44,14.22) ; *.3@36.458,36.925 36.523,36.86 38.13,36.86 38.13,22.57 37.28,21.72 37.28,20.65 ; v1(49.93,9.73) Q4.3@53.72,9.73
  Top Layer w0.5: R10.2@33.321,14.274 R7.1@35.55,14.274 ; R7.1@35.639,14.22 35.639,18.329 37.28,19.97 37.28,20.65
  Bottom Layer w0.3: v1(37.44,14.22) 45.44,14.22 v1(49.93,9.73)
GND: "SD CARD.5"@59.419,38.056 *.1@36.447,39.471 *.15@39.232,21.961 *.38@53.447,39.471 BOOT.1@41.329,6.706 BT3.2@79.219,2.986 C1.2@13.379,6.156 C2.2@43.705,9.929 C3.2@35.154,10.062 C4.2@70.289,10.806 C5.2@70.289,8.746 CN1.6@78.91,34.37 DO.3@12.659,24.886 EN.1@38.499,6.706 IC1.6@16.979,22.981 IC1.7@16.979,21.711 IC1.8@16.979,20.441 L1.2@24.289,4.946 L2.2@20.919,4.956 L3.2@70.399,6.686 pH.3@12.639,27.786 POW.3@16.549,5.946 RTC.1@64.22,27.08 SIM_UART.3@59.659,24.446 TDS.3@12.609,22.036 TEMP.2@9.769,31.196 U1.4@75.879,17.081 U1.7@81.679,19.621 U2.5@74.094,9.901 U2.6@74.094,8.631 U2.7@74.094,7.361 U2.8@74.094,6.091 U2.9@83.544,6.091 U2.10@83.544,7.361 U2.11@83.544,8.631 U2.12@83.544,9.901 U2.13@83.544,11.171 UPLOAD.5@54.069,4.946 | length 355.4
  Top Layer w0.3: IC1.6@16.99,22.975 16.99,20.435 18.465,20.435 18.78,20.75 v1(18.78,22.07) ; v1(33.33,39.6) 33.465,39.465 39.52,39.465 ; C3.2@35.164,10.057 43.582,10.057 C2.2@43.716,9.923 ; *.15@39.243,21.955 39.52,22.232 39.52,39.465 ; *.38@53.458,39.465 39.52,39.465 ; 61.57,38.05 62.87,36.75 62.87,28.43 RTC.1@64.22,27.08 ; C4.2@70.3,10.8 C5.2@70.3,8.74 ; L3.2@70.41,6.68 70.41,8.63 C5.2@70.3,8.74 ; U1.4@75.89,17.075 U1.4@75.97,17.075 ; v1(76.75,3.06) 75.47,3.06 74.105,4.425 U2.6@74.105,8.625 ; U1.7@81.69,19.615 80.065,19.615 77.525,17.075 U1.4@75.97,17.075 ; v1(83.05,3.02) 83.555,3.525 83.555,8.631 U2.13@83.555,11.165 ; C5.2@70.3,8.74 73.99,8.74 U2.6@74.105,8.625 ; U2.6@74.105,8.625 74.105,9.895 77.035,9.895 78.46,11.32 78.46,12.56 78.351,12.669 78.351,14.574 75.97,16.955 U1.4@75.97,17.075
  Top Layer w0.5: 7.046,46.636 7.046,44.264 10.99,40.32 ; TDS.3@12.62,22.03 12.67,22.08 12.67,24.88 12.65,24.9 pH.3@12.65,27.78 ; IC1.8@16.99,20.435 16.175,20.435 11.79,16.05 11.79,15.3 ; L2.2@20.89,4.91 20.59,4.61 17.89,4.61 16.35,6.15 13.39,6.15 11.79,7.75 11.79,15.3 ; L2.2@20.93,4.95 24.29,4.95 24.3,4.94 36.46,4.94 38.22,6.7 EN.1@38.51,6.7 ; v1(33.33,39.6) 27.88,39.6 27.16,40.32 10.99,40.32 ; C3.2@35.164,10.057 35.164,8.996 35.91,8.25 36.96,8.25 EN.1@38.51,6.7 ; BOOT.1@41.34,6.7 EN.1@38.51,6.7 ; C2.2@43.716,9.923 43.716,8.196 42.22,6.7 45.7,6.7 48.95,3.45 52.59,3.45 UPLOAD.5@54.08,4.94 ; *.38@53.458,39.465 57.135,39.465 58.76,37.84 59.57,37.84 ; 59.43,38.05 61.57,38.05 ; 10.99,40.32 7.65,40.32 3.446,36.116 3.446,22.204 10.35,15.3 11.79,15.3
  Bottom Layer w0.3: TEMP.2@9.78,31.19 9.78,29.153 8.906,28.279 8.906,27.277 8.91,27.273 8.91,27.21 9.66,26.46 11.33,26.46 pH.3@12.65,27.78 ; TDS.3@12.62,22.03 18.74,22.03 v1(18.78,22.07) ; SIM_UART.3@59.659,24.446 62.294,27.08 RTC.1@64.22,27.08 64.779,26.521 80.131,26.521 81.42,27.81 81.42,33.22 80.27,34.37 ; v1(76.75,3.06) 76.79,3.02 v1(83.05,3.02)
  Bottom Layer w0.5: CN1.6@78.91,34.37 80.27,34.37 86.79,34.37 90.6,30.56 90.6,7.56 86.06,3.02 v1(83.05,3.02)
IO0: *.25@53.447,22.961 Q5.3@60.339,11.676 R8.1@43.489,13.931 R9.2@45.71,13.9 | length 31.2
  Top Layer w0.3: R9.2@45.721,13.894 47.124,13.894 ; *.25@53.458,22.955 53.458,20.228 47.124,13.894 ; Q5.3@60.35,11.67 60.14,11.88 60.14,13.61 59.02,14.73 53.07,14.73 52.234,13.894 47.124,13.894
  Top Layer w0.5: R8.1@43.499,13.926 45.69,13.926 R9.2@45.721,13.894
IO2: *.24@50.662,21.961 R11.1@24.169,11.101 | length 32.2
  Top Layer w0.3: R11.1@24.179,11.096 27.386,11.096 v1(27.78,11.49) ; v1(49.7,18.99) 50.673,19.963 *.24@50.673,21.955
  Bottom Layer w0.3: v1(27.78,11.49) 35.28,18.99 v1(49.7,18.99)
MISO: "SD CARD.3"@59.419,32.976 *.31@53.447,30.581 CN1.7@78.71,35.47 R22.1@74.606,35.461 | length 29.7
  Top Layer w0.3: v1(64.41,32.98) 65.61,34.18 v1(66.64,34.18) ; R22.1@74.606,35.461 74.656,35.41 v1(76.53,35.41)
  Top Layer w0.5: *.31@53.458,30.575 55.013,30.575 55.529,30.059 56.671,30.059 59.43,32.818 59.43,32.97
  Bottom Layer w0.3: 59.419,32.976 59.424,32.98 v1(64.41,32.98) ; v1(66.64,34.18) 70.07,34.18 71.3,35.41 v1(76.53,35.41) 78.65,35.41 CN1.7@78.71,35.47
MOSI: "SD CARD.4"@59.419,35.516 *.37@53.447,38.201 CN1.3@78.71,31.07 R20.1@74.65,31.39 | length 30.5
  Top Layer w0.3: R20.1@74.65,31.39 74.96,31.7 75.24,31.42 v1(76.49,31.42)
  Top Layer w0.5: *.37@53.458,38.195 56.205,38.195 59.1,35.3 59.57,35.3
  Bottom Layer w0.3: 59.419,35.516 63.524,35.516 67.576,31.464 76.446,31.464 v1(76.49,31.42) 77.14,31.42 77.49,31.07 CN1.3@78.71,31.07
NetBT1_2: BOOT.2@48.329,6.706 C2.1@45.605,9.929 R9.1@45.71,12 | length 7.1
  Top Layer w0.5: R9.1@45.721,11.994 45.616,11.889 45.616,8.354 47.27,6.7 BOOT.2@48.34,6.7
NetBT2_2: C3.1@33.254,10.062 EN.2@31.499,6.706 R10.1@33.31,12.38 | length 6.8
  Top Layer w0.5: EN.2@31.51,6.7 32.12,6.7 33.264,7.844 33.264,10.057 33.321,10.113 R10.1@33.321,12.374
NetBT3_1: BT3.1@79.219,20.186 D1.2@86.539,12.071 U2.14@83.544,12.441 | length 14
  Top Layer w0.3: v1(81.405,12.435) 83.555,12.435 86.18,12.435 D1.2@86.55,12.065
  Bottom Layer w0.3: BT3.1@79.31,20.22 79.31,16.79 81.229,14.871 81.229,12.611 v1(81.405,12.435)
NetD1_1: D1.1@86.539,9.121 R17.2@88.719,9.636 | length 2.4
  Top Layer w0.3: D1.1@86.55,9.115 88.215,9.115 R17.2@88.73,9.63
NetL1_1: L1.1@24.289,7.232 R11.2@24.169,9.201 | length 2
  Top Layer w0.5: R11.2@24.179,9.196 24.179,7.347 L1.1@24.3,7.226
NetL2_1: L2.1@20.919,7.242 R12.2@20.939,9.061 | length 1.8
  Top Layer w0.5: L2.1@20.93,7.236 20.949,7.255 R12.2@20.949,9.056
NetL3_1: L3.1@70.399,4.4 R18.1@68.269,4.516 | length 2.2
  Top Layer w0.3: R18.1@68.28,4.51 70.294,4.51 L3.1@70.41,4.394
NetQ4_1: Q4.1@53.709,11.636 R13.2@55.875,7.907 | length 4.8
  Top Layer w0.5: Q4.1@53.72,11.63 54.05,11.63 55.14,10.54 55.14,8.646 R13.2@55.886,7.901
NetQ5_1: Q5.1@60.339,9.776 R14.1@57.865,13.387 | length 5
  Top Layer w0.5: R14.1@57.876,13.381 57.876,12.464 59.28,11.06 59.28,10.27 59.78,9.77 Q5.1@60.35,9.77
NetR15_2: R15.2@73.663,18.667 U1.3@75.879,18.351 | length 2.3
  Top Layer w0.3: R15.2@73.674,18.661 74.599,18.661 74.89,18.37 75.865,18.37 U1.3@75.89,18.345
NetR15_3: R15.3@73.661,19.535 U1.2@75.879,19.621 | length 2.3
  Top Layer w0.3: R15.3@73.672,19.529 75.804,19.529 U1.2@75.89,19.615